# EAGLE board XstractiK_Domination_Player_UpperArm_V1 (EAGLE 9.6.2)
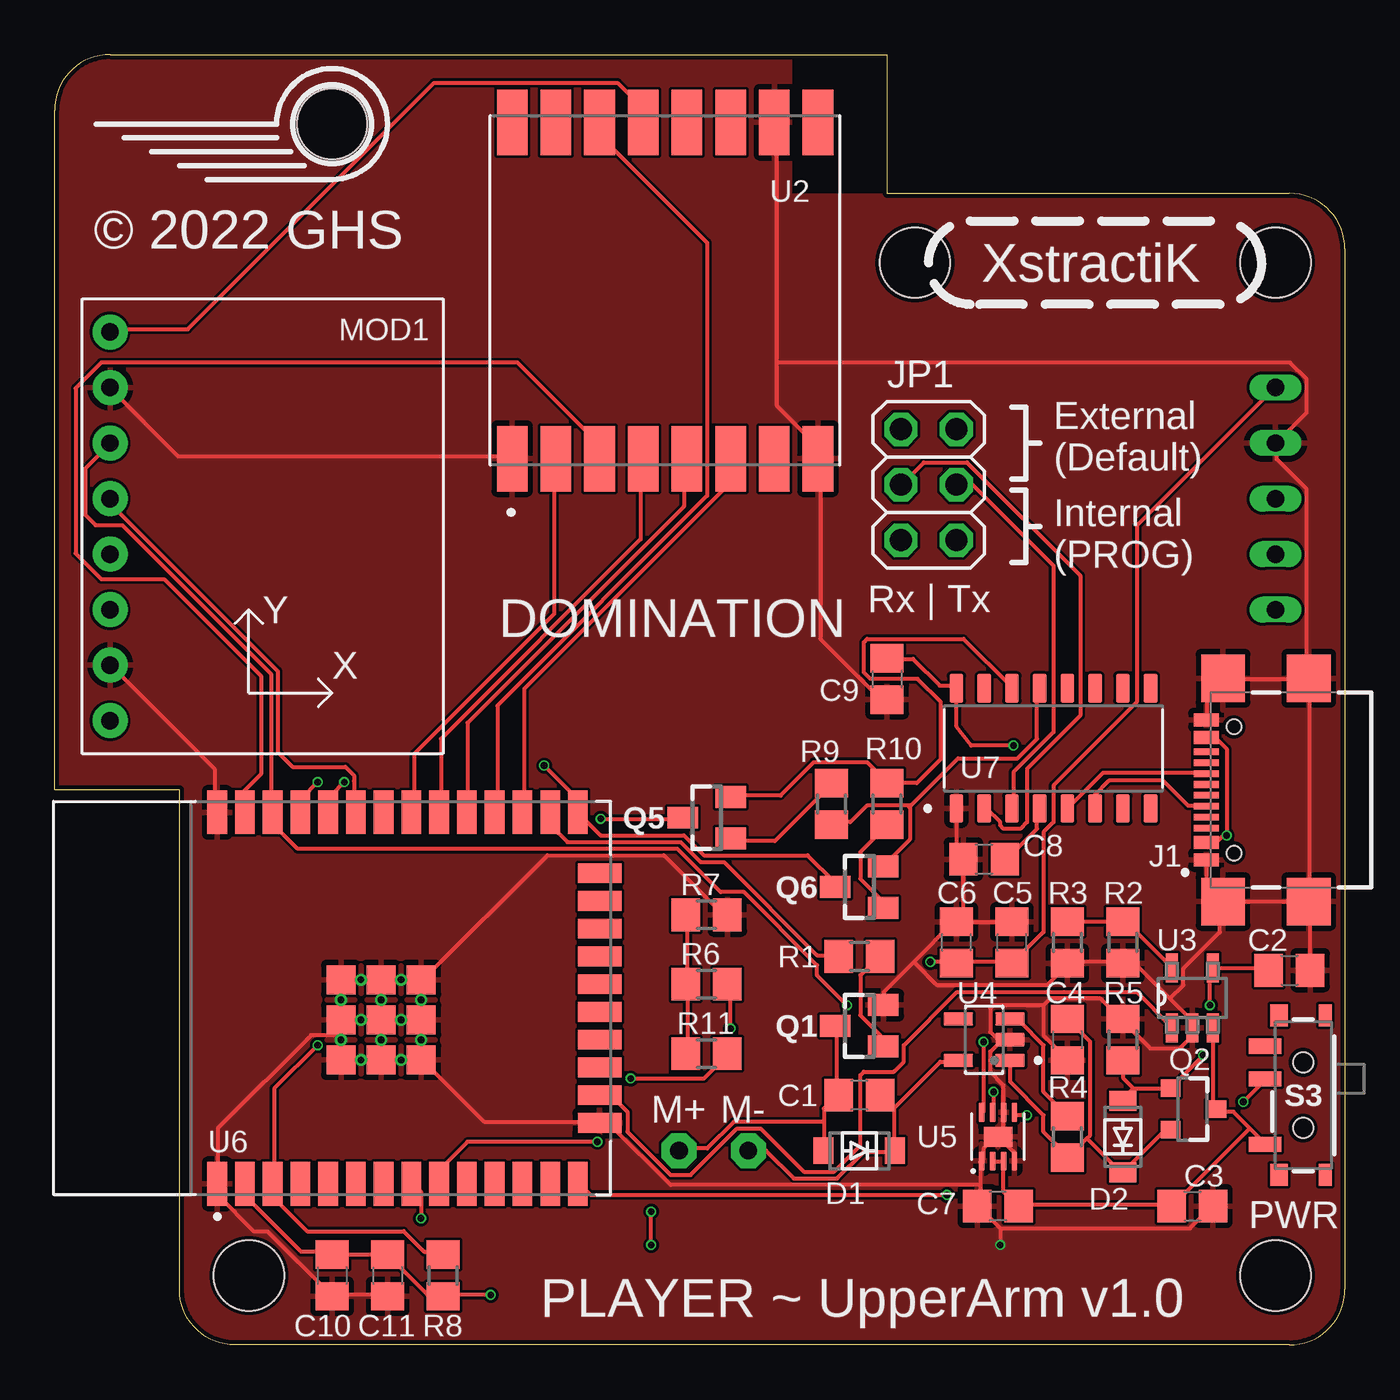
[diagram p0: board, top side]
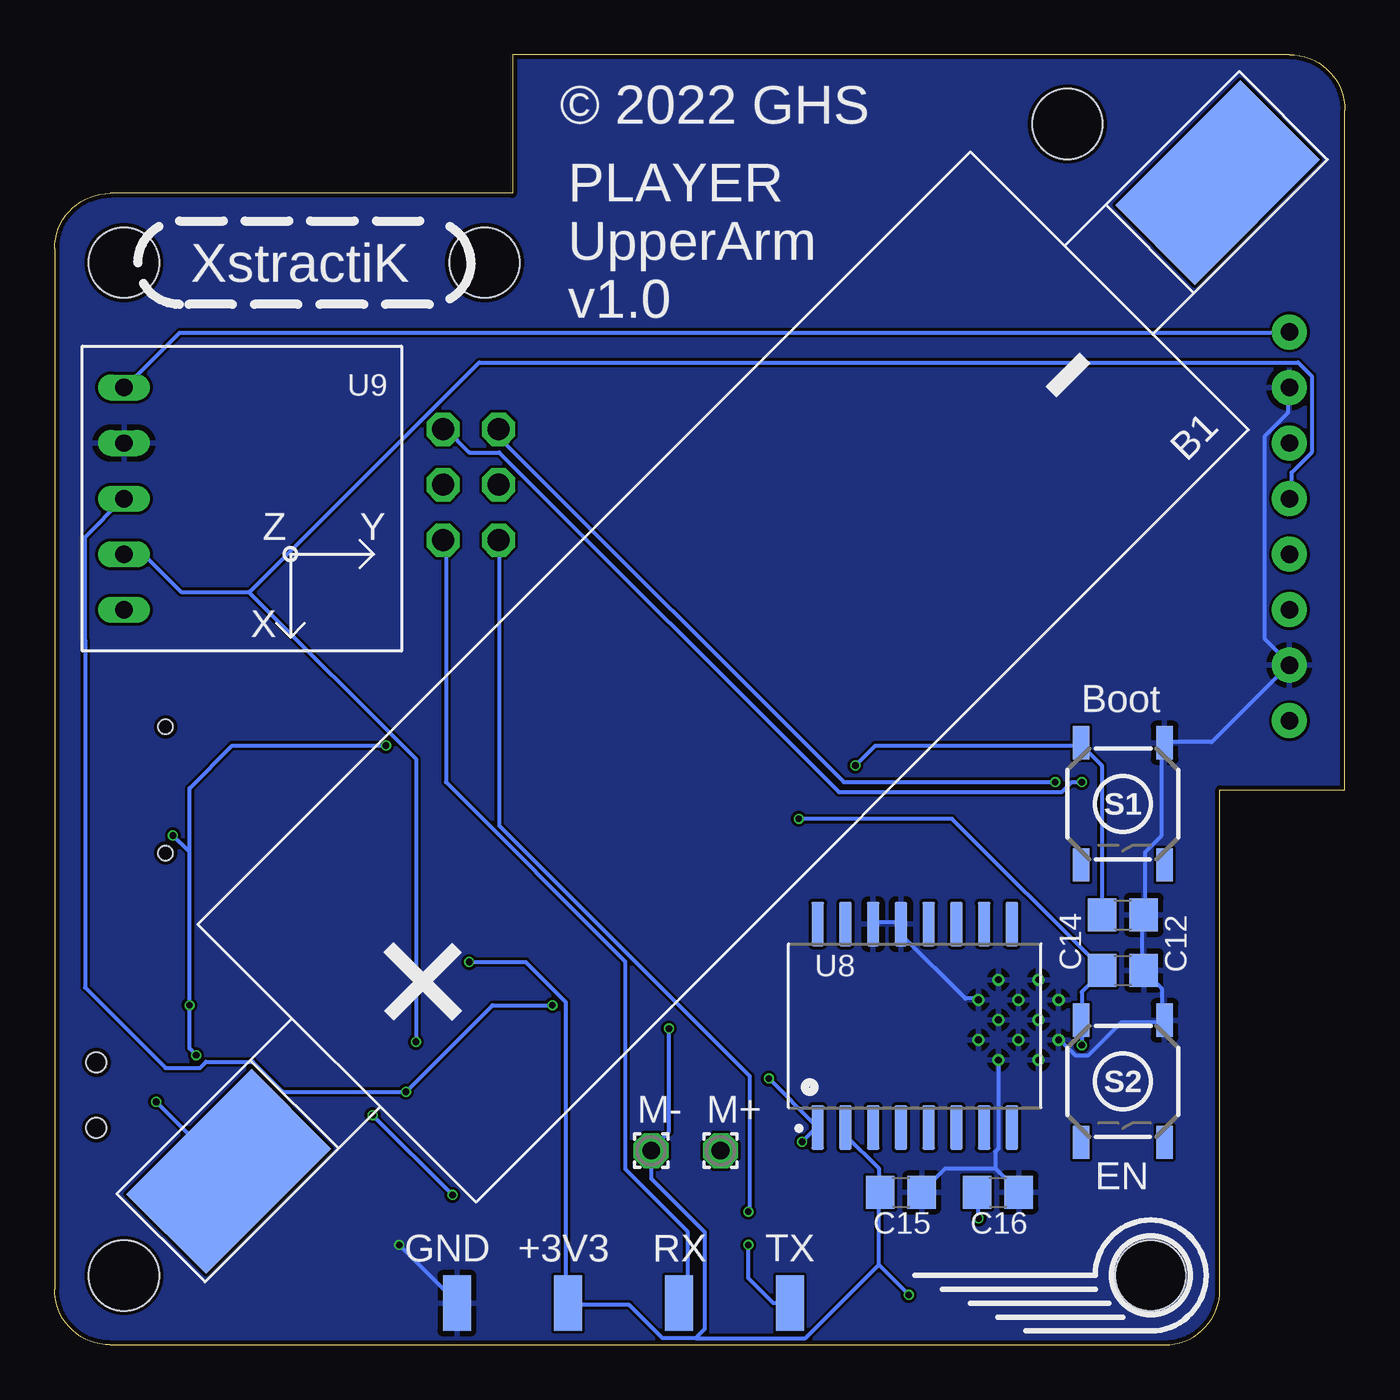
[diagram p1: board, bottom side, seen from below]

Size 59.05 x 59.05 mm. Coordinates in mm from the lower left corner, seen from the top.
Outline: 38.1,52.7 56.52,52.7 arc-90 59.05,50.16 59.05,2.54 arc-90 56.52,0 8.26,0 arc-90 5.71,2.54 5.71,25.4 0,25.4 0,56.52 arc-90 2.54,59.05 38.1,59.05 38.1,52.7
Copper layers (1*16): Top 0.035559375mm / dielectric 1.6mm / Bottom 0.035559375mm
Design rules "jlcpcb2layer *": minimum track width 7mil, minimum drill 12mil, track to track 5mil, track to pad 5mil, pad to pad 5mil, via to via 5mil, smd to smd 5mil, copper to edge 8mil, drill to drill 6mil, minimum pad ring 5mil, minimum via ring 3mil, stop-mask expansion 2.5mil, vias tented up to drill 0mil, thermal gap 10mil
Holes 3.2 mm at 8.89,3.17 55.88,3.17 55.88,49.53 12.7,55.88 39.37,49.53
tRestrict: area 33.8,57.5 to 38.1,59.1; area 33.8,54.4 to 34.2,57.5; area 33.8,52.7 to 38.1,54.4; area 35.7,54.4 to 38.1,57.5

## Footprints (pad centres in the part's own frame; a part is rotated, then mirrored left to right if it is on the bottom)
ICR18500 = smd 8.1 x 5.15: + 57,9; - -7,9
C0805 = smd 1.3 x 1.5: 1 -0.95,0; 2 0.95,0
ON_SEMICONDUCTOR_MBR120VLSFT1G_0 = smd 0.91 x 1.22: 1 -1.635,0; 2 1.635,0
GCT_USB4110-GF-A_REVB = smd 0.6 x 1.15: A1/B12 -3.2,1.27; A4/B9 -2.4,1.27; B1/A12 3.2,1.27; B4/A9 2.4,1.27 | smd 0.3 x 1.15: A5 -1.25,1.27; A6 -0.25,1.27; A7 0.25,1.27; A8 1.25,1.27; B5 1.75,1.27; B6 0.75,1.27; B7 -0.75,1.27; B8 -1.75,1.27 | smd 2.18 x 2: S1 -5.11,0.5; S2 5.11,0.5; S3 -5.11,-3.43; S4 5.11,-3.43 | hole 0.65: -2.89,0; 2.89,0
2X03 = drill 1.016 octagon: 1 -2.54,-1.27; 2 -2.54,1.27; 3 0,-1.27; 4 0,1.27; 5 2.54,-1.27; 6 2.54,1.27
GY-521 = drill 0.8 pad 1.6: 1 -6.985,8.89; 2 -6.985,6.35; 3 -6.985,3.81; 4 -6.985,1.27; 5 -6.985,-1.27; 6 -6.985,-3.81; 7 -6.985,-6.35; 8 -6.985,-8.89
1,6/0,8 = drill 0.813 pad 1.6 octagon: 1 0,0
SMD1,27-2,54 = smd 1.27 x 2.54: 1 0,0
SOT23-BEC = smd 1 x 1.4: B -0.95,-1.1; C 0,1.1; E 0.95,-1.1
SOT23-3 = smd 0.9 x 0.8: 1 1,-0.95; 2 1,0.95; 3 -1.1,0
R0805 = smd 1.3 x 1.5: 1 -0.95,0; 2 0.95,0
TACTILE_SWITCH_SMD_5.2MM = smd 1.524 x 0.762: 1 -2.794,1.905; 2 2.794,1.905; 3 -2.794,-1.905; 4 2.794,-1.905
SWITCH_SPST_SMD_A = smd 0.7 x 1.5: 1 -2.25,-1.75; 2 -0.75,-1.75; 3 2.25,-1.75 | smd 1 x 0.6: GND1 -3.65,1; GND3 3.65,1 | smd 1 x 0.8: GND2 -3.65,-1.1; GND4 3.65,-1.1 | hole 0.9: -1.5,0; 1.5,0
XCVR_RFM95W-915S2 = smd 3 x 1.4: 1 -7.7,7; 2 -7.7,5; 3 -7.7,3; 4 -7.7,1; 5 -7.7,-1; 6 -7.7,-3; 7 -7.7,-5; 8 -7.7,-7; 9 7.7,-7; 10 7.7,-5; 11 7.7,-3; 12 7.7,-1; 13 7.7,1; 14 7.7,3; 15 7.7,5; 16 7.7,7
SOT95P270X145-5N = smd 1.321 x 0.559: 1 -1.372,0.94; 2 -1.372,0; 3 -1.372,-0.94; 4 1.372,-0.94; 5 1.372,0.94
SOT95P285X140-5N = smd 1.35 x 0.6: 1 -1.185,0.95; 2 -1.185,0; 3 -1.185,-0.95; 4 1.185,-0.95; 5 1.185,0.95
SON50P200X200X80-9N = smd 0.889 x 0.27: 1 -1.112,0.75; 2 -1.112,0.25; 3 -1.112,-0.25; 4 -1.112,-0.75; 5 1.112,-0.75; 6 1.112,-0.25; 7 1.112,0.25; 8 1.112,0.75 | smd 0.9 x 1.3: 9 0,0
MODULE_ESP32-WROOM-32D = smd 2 x 0.9: 1 -8.5,5.26; 2 -8.5,3.99; 3 -8.5,2.72; 4 -8.5,1.45; 5 -8.5,0.18; 6 -8.5,-1.09; 7 -8.5,-2.36; 8 -8.5,-3.63; 9 -8.5,-4.9; 10 -8.5,-6.17; 11 -8.5,-7.44; 12 -8.5,-8.71; 13 -8.5,-9.98; 14 -8.5,-11.25; 25 8.5,-11.25; 26 8.5,-9.98; 27 8.5,-8.71; 28 8.5,-7.44; 29 8.5,-6.17; 30 8.5,-4.9; 31 8.5,-3.63; 32 8.5,-2.36; 33 8.5,-1.09; 34 8.5,0.18; 35 8.5,1.45; 36 8.5,2.72; 37 8.5,3.99; 38 8.5,5.26 | smd 0.9 x 2: 15 -5.715,-12.25; 16 -4.445,-12.25; 17 -3.175,-12.25; 18 -1.905,-12.25; 19 -0.635,-12.25; 20 0.635,-12.25; 21 1.905,-12.25; 22 3.175,-12.25; 23 4.445,-12.25; 24 5.715,-12.25 | smd 1.33 x 1.33: 39_1 -2.835,-0.405; 39_2 -1,-0.405; 39_3 0.835,-0.405; 39_4 -2.835,-2.24; 39_5 -1,-2.24; 39_6 0.835,-2.24; 39_7 -2.835,-4.075; 39_8 -1,-4.075; 39_9 0.835,-4.075 | drill 0.305 pad 0.508: 39_10 -1.917,-0.405; 39_11 -0.083,-0.405; 39_12 -2.835,-1.323; 39_13 -1,-1.323; 39_14 0.835,-1.323; 39_15 -1.917,-2.24; 39_16 -0.083,-2.24; 39_17 -2.835,-3.158; 39_18 -1,-3.158; 39_19 0.835,-3.158; 39_20 -1.917,-4.075; 39_21 -0.083,-4.075
SOIC127P600X180-16N = smd 1.31 x 0.62: 1 -2.75,4.445; 2 -2.75,3.175; 3 -2.75,1.905; 4 -2.75,0.635; 5 -2.75,-0.635; 6 -2.75,-1.905; 7 -2.75,-3.175; 8 -2.75,-4.445; 9 2.75,-4.445; 10 2.75,-3.175; 11 2.75,-1.905; 12 2.75,-0.635; 13 2.75,0.635; 14 2.75,1.905; 15 2.75,3.175; 16 2.75,4.445
SOIC127P1032X265-16N = smd 2.05 x 0.59: 1 -4.655,4.445; 2 -4.655,3.175; 3 -4.655,1.905; 4 -4.655,0.635; 5 -4.655,-0.635; 6 -4.655,-1.905; 7 -4.655,-3.175; 8 -4.655,-4.445; 9 4.655,-4.445; 10 4.655,-3.175; 11 4.655,-1.905; 12 4.655,-0.635; 13 4.655,0.635; 14 4.655,1.905; 15 4.655,3.175; 16 4.655,4.445
GY-271 = drill 0.8 long: 1 -5.08,5.08; 2 -5.08,2.54; 3 -5.08,0; 4 -5.08,-2.54; 5 -5.08,-5.08

## Placement (x,y rotation side)
B1  ICR18500  [ICR18500]  17.14,54.61 225 bottom
C1  0.1uF  [C0805]  36.83,11.43 180 top
C2  4.7uF  [C0805]  56.52,17.14 0 top
C3  4.7uF  [C0805]  52.07,6.35 0 top
C4  10uF  [C0805]  46.35,13.97 270 top
C5  10uF  [C0805]  43.81,18.41 90 top
C6  1uF  [C0805]  41.27,18.41 90 top
C7  0.1uF  [C0805]  43.18,6.35 180 top
C8  0.01uF  [C0805]  42.55,22.23 180 top
C9  0.1uF  [C0805]  38.1,30.48 270 top
C10  0.1uF  [C0805]  12.7,3.17 270 top
C11  22uF  [C0805]  15.24,3.17 270 top
C12  0.1uF  [C0805]  10.16,17.14 0 bottom
C14  0.1uF  [C0805]  10.16,19.68 0 bottom
C15  0.1uF  [C0805]  20.32,6.99 0 bottom
C16  1nF  [C0805]  15.88,6.99 0 bottom
D1  ON_SEMICONDUCTOR_MBR120VLSFT1GON_SEMICONDUCTOR_MBR120VLSFT1G_0_0  [ON_SEMICONDUCTOR_MBR120VLSFT1G_0]  36.83,8.89 180 top
D2  ON_SEMICONDUCTOR_MBR120VLSFT1GON_SEMICONDUCTOR_MBR120VLSFT1G_0_0  [ON_SEMICONDUCTOR_MBR120VLSFT1G_0]  48.9,9.53 90 top
J1  USB4110-GF-A_REVB  [GCT_USB4110-GF-A_REVB]  53.98,25.4 90 top
JP1  [2X03]  40.01,39.37 90 top
MOD1  GY-521MPU6050  [GY-521]  9.53,37.47 0 top
PAD5  WIREPAD1,6/0,8  [1,6/0,8]  31.75,8.89 0 bottom
PAD6  WIREPAD1,6/0,8  [1,6/0,8]  28.57,8.89 0 bottom
PAD7  WIREPADSMD1,27-254  [SMD1,27-2,54]  35.56,1.91 0 bottom
PAD8  WIREPADSMD1,27-254  [SMD1,27-2,54]  30.48,1.91 0 bottom
PAD9  WIREPADSMD1,27-254  [SMD1,27-2,54]  25.4,1.91 0 bottom
PAD10  WIREPADSMD1,27-254  [SMD1,27-2,54]  40.64,1.91 0 bottom
Q1  MMBT2222  [SOT23-BEC]  36.83,14.61 90 top
Q2  AO3401A  [SOT23-3]  52.07,10.79 180 top
Q5  MMBT2222  [SOT23-BEC]  29.84,24.13 90 top
Q6  MMBT2222  [SOT23-BEC]  36.83,20.95 90 top
R1  1K  [R0805]  36.83,17.78 0 top
R2  2K  [R0805]  48.9,18.41 90 top
R3  [R0805]  46.35,18.41 90 top
R4  100K  [R0805]  46.35,9.53 90 top
R5  100K  [R0805]  48.9,13.97 270 top
R6  680K  [R0805]  29.84,16.51 0 top
R7  220K  [R0805]  29.84,19.68 180 top
R8  100K  [R0805]  17.78,3.17 270 top
R9  10K  [R0805]  35.56,24.77 270 top
R10  10K  [R0805]  38.1,24.77 90 top
R11  10K  [R0805]  29.84,13.34 180 top
S1  MOMENTARY-SWITCH-SPST-SMD-5.2MM-TALL  [TACTILE_SWITCH_SMD_5.2MM]  10.16,24.77 270 bottom
S2  MOMENTARY-SWITCH-SPST-SMD-5.2MM-TALL  [TACTILE_SWITCH_SMD_5.2MM]  10.16,12.06 270 bottom
S3  [SWITCH_SPST_SMD_A]  57.15,11.43 270 top
U2  RFM95W-915S2  [XCVR_RFM95W-915S2]  27.94,48.26 90 top
U3  MCP73831T  [SOT95P270X145-5N]  52.07,15.88 90 top
U4  AP2112K-3.3  [SOT95P285X140-5N]  42.55,13.97 180 top
U5  MAX17048G  [SON50P200X200X80-9N]  43.18,9.53 90 top
U6  ESP32-WROOM-32D  [MODULE_ESP32-WROOM-32D]  12.7,15.88 90 top
U7  CH340C  [SOIC127P600X180-16N]  45.72,27.3 90 top
U8  DS3231SN  [SOIC127P1032X265-16N]  19.68,14.61 90 bottom
U9  QMC5883GY-271  [GY-271]  50.8,38.73 0 bottom

## Library data of the parts
B1 = Batteries
C1-C12 C14-C16 = rcl; SPICEPREFIX: C
D1 D2 = MBR120VLSFT1G; COMPONENT_LINK_1_DESCRIPTION: Manufacturer URL; COMPONENT_LINK_1_URL: http://www.onsemi.com/; COMPONENT_LINK_3_DESCRIPTION: Package Specification; COMPONENT_LINK_3_URL: http://www.onsemi.cn/pub_link/Collateral/MBR120VLSFT1-D.PDF; CONFIGURATION: Single; DATASHEET: http://www.onsemi.cn/pub_link/Collateral/MBR120VLSFT1-D.PDF; DATASHEET_VERSION: Rev. 2; IFSM_MAX_A: 45; IMPORTED: yes; IMPORTED_FROM: vault; IMPORT_TS: 1521178043; MF: On Semiconductor; MOUNTING_TECHNOLOGY: Surface Mount; MPN: MBR120VLSFT1G; PACKAGE: SOD-123FL-2-498-01; PACKAGE_DESCRIPTION: 2-Pin SOD, Body 1.65 x 2.7 mm; PACKAGE_VERSION: Rev. A; PACKING: Tape and Reel; PREFIX: D; ROHS: Yes; VAULT_GUID: 4A61E613-4CE2-4B75-A462-25A6CC2A8907; VAULT_REVISION: 780FB999-FC13-4133-9298-794FC10DBA1F
J1 = USB-C-SMD; AVAILABILITY: In Stock; DESCRIPTION: USB-C (USB TYPE-C) USB 2.0 Receptacle Connector 24 (16+8 Dummy) Position Surface Mount, Right Angle; Through Hole; MF: GCT; MP: USB4110-GF-A; PACKAGE: None; PRICE: None; PURCHASE-URL: https://pricing.snapeda.com/search/part/USB4110-GF-A/?ref=eda
JP1 = pinhead
MOD1 = MPU6050; AVAILABILITY: Not in stock; DESCRIPTION: Triple Axis Accelerometer Gyro Breakout; MF: GODREAM FORDREAM CO., LIMITED; MP: GY-521; PACKAGE: Package; PRICE: None
PAD5-PAD10 = wirepad
Q1 Q5 Q6 = MMBT2222; AVAILABILITY: In Stock; DESCRIPTION: Bipolar (BJT) Transistor NPN 30 V 600 mA 250MHz 300 mW Surface Mount SOT-23-3 (TO-236); MF: ON Semiconductor; MP: MMBT2222; PACKAGE: SOT-23-3 Fairchild Semiconductor; PRICE: None; PURCHASE-URL: https://pricing.snapeda.com/search/part/MMBT2222/?ref=eda
Q2 = AO3401A; AVAILABILITY: In Stock; DESCRIPTION: P-Channel 30 V 4A (Ta) 1.4W (Ta) Surface Mount SOT-23-3; MF: Alpha & Omega Semiconductor Inc.; MP: AO3401A; PACKAGE: TO-236-3 Alpha &amp; Omega Semiconductor Inc.; PRICE: None; PURCHASE-URL: https://pricing.snapeda.com/search/part/AO3401A/?ref=eda
R1-R11 = rcl; SPICEPREFIX: R
S1 S2 = Switches; PROD_ID: SWCH-14139
S3 = Switches; PROD_ID: SWCH-10651; SF_SKU: COM-10860
U2 = RFM95W-915S2; AVAILABILITY: In Stock; DESCRIPTION: 802.15.4 LoRa™ Transceiver Module 915MHz Antenna Not Included Surface Mount; MF: RF Solutions; MP: RFM95W-915S2; PACKAGE: SMD-16 RF Solutions; PRICE: None; PURCHASE-URL: https://pricing.snapeda.com/search/part/RFM95W-915S2/?ref=eda
U3 = MCP73831T-3ACI_OT; AVAILABILITY: In Stock; DESCRIPTION: Charger IC Lithium Ion/Polymer SOT-23-5; MF: Microchip; MP: MCP73831T-3ACI/OT; PACKAGE: SOT-23-5 Microchip; PRICE: None; PURCHASE-URL: https://pricing.snapeda.com/search/part/MCP73831T-3ACI/OT/?ref=eda
U4 = AP2112K-3.3TRG1; AVAILABILITY: In Stock; DESCRIPTION: Linear Voltage Regulator IC Positive Fixed 1 Output 600mA SOT-25; MF: Diodes Inc.; MP: AP2112K-3.3TRG1; PACKAGE: SOT-753 Diodes Inc.; PRICE: None; PURCHASE-URL: https://pricing.snapeda.com/search/part/AP2112K-3.3TRG1/?ref=eda
U5 = MAX17048G; AVAILABILITY: In Stock; DESCRIPTION: Battery Battery Monitor IC Lithium Ion 8-TDFN-EP (2x2); MF: Maxim Integrated; MP: MAX17048G; PACKAGE: TDFN-8 Maxim; PRICE: None; PURCHASE-URL: https://pricing.snapeda.com/search/part/MAX17048G/?ref=eda
U6 = ESP32-WROOM-32D; AVAILABILITY: In Stock; DESCRIPTION: Bluetooth, WiFi 802.11b/g/n, Bluetooth v4.2 +EDR, Class 1, 2 and 3 Transceiver Module 2.4GHz ~ 2.5GHz Integrated; MF: Espressif Systems; MP: ESP32-WROOM-32D; PACKAGE: Module Espressif Systems; PRICE: None; PURCHASE-URL: https://pricing.snapeda.com/search/part/ESP32-WROOM-32D/?ref=eda
U7 = CH340C; AVAILABILITY: Not in stock; DESCRIPTION: USB to serial chip CH340; MF: WCH; MP: CH340C; PACKAGE: None; PRICE: None
U8 = DS3231SN; AVAILABILITY: In Stock; DESCRIPTION: Real Time Clock (RTC) IC Clock/Calendar - I²C, 2-Wire Serial 16-SOIC (0.295, 7.50mm Width); MF: Maxim Integrated; MP: DS3231SN; PACKAGE: SOIC-16 Maxim; PRICE: None; PURCHASE-URL: https://pricing.snapeda.com/search/part/DS3231SN/?ref=eda
U9 = QMC5883

## Nets
32K_XN: R11.1 U6.9 U8.1
32K_XP: C16.1 U6.8
+: B1.+ S3.2
+0.8V: R6.1 R7.2 R11.2
+3V3: C1.1 C5.1 C6.1 C10.1 C11.1 C15.1 D1.1 MOD1.1 PAD5.1 PAD7.1 R6.2 R8.2 U2.13 U4.5 U6.2 U8.2 U9.1
-: B1.-
BAT_!ALRT: U5.5 U6.14
BAT_CHRG: U3.1 U6.16
BOOT: C14.1 Q6.C S1.3 U6.25
CHRG_PROG: R2.2 R3.2 U3.5
EN: C12.1 Q5.C R8.1 S2.3 U6.3
GND: C2.2 C3.2 C4.2 C5.2 C6.2 C7.2 C8.2 C9.2 C10.2 C11.2 C12.2 C14.2 C15.2 C16.2 J1.A1/B12 J1.B1/A12 J1.S1 J1.S2 J1.S3 J1.S4 MOD1.2 MOD1.7 PAD10.1 Q1.E R2.1 R3.1 R5.1 R7.1 S1.1 S2.1 U2.1 U2.8 U2.10 U3.2 U4.2 U5.1 U5.4 U5.6 U5.9 U6.1 U6.15 U6.38 U6.39_1 U6.39_2 U6.39_3 U6.39_4 U6.39_5 U6.39_6 U6.39_7 U6.39_8 U6.39_9 U6.39_10 U6.39_11 U6.39_12 U6.39_13 U6.39_14 U6.39_15 U6.39_16 U6.39_17 U6.39_18 U6.39_19 U6.39_20 U6.39_21 U7.1 U8.13 U8.14 U9.2
I2C_SCL: MOD1.3 U5.7 U6.36 U9.3
I2C_SDA: MOD1.4 U5.8 U6.33 U9.4
LORA_!RST: U2.6 U6.27
LORA_DIO0: U2.14 U6.28
LORA_SS: U2.5 U6.29
M-: C1.2 D1.2 PAD6.1 Q1.C
N$2: Q1.B R1.2
N$6: Q6.B R10.1
N$7: Q5.B R9.1
REG_EN: R4.2 U4.3
REG_VIN: C4.1 D2.1 Q2.2 R4.1 U4.1
RXD: JP1.4 U7.2
RXD0: JP1.6 U6.34
RXD0_EXT: JP1.2 PAD9.1
SPI_MISO: U2.2 U6.31
SPI_MOSI: U2.3 U6.37
SPI_SCK: U2.4 U6.30
TXD: JP1.3 U7.3
TXD0: JP1.5 U6.35
TXD0_EXT: JP1.1 PAD8.1
UART_!DTR: Q6.E R9.2 U7.13
UART_!RTS: Q5.E R10.2 U7.14
USB_DN: J1.B7 U7.6
USB_DP: J1.B6 U7.5
V3: C8.1 U7.4
VBAT: C3.1 C7.1 Q2.3 S3.3 U3.3 U5.2 U5.3
VBUS: C2.1 C9.1 D2.2 J1.A4/B9 J1.B4/A9 Q2.1 R5.2 U3.4 U7.16
VIBR_EN: R1.1 U6.26

## Tracks (layer width: path | path; a pad name or v marks a point on that pad's centre or on a via)
32K_XN  (via drill 0.3)
  Top 0.178: v26.36,12.19 29.72,12.19 30.79,13.26 R11.1 | v24.84,9.3 18.9,9.3 17.68,8.08 17.68,7.47 U6.9
  Bottom 0.178: v26.36,12.19 24.23,10.06 U8.1 24.23,9.91 v24.84,9.3
32K_XP  (via drill 0.3)
  Top 0.178: v16.76,5.79 16.76,7.01 16.46,7.32 U6.8
  Bottom 0.178: v16.76,5.79 16.76,6.86 C16.1
+  (via drill 0.3)
  Top 0.178: v54.41,11.12 55.32,12.04 S3.2
  Bottom 0.178: v54.41,11.12 51.21,7.92 B1.+
+0.8V
  Top 0.178: R11.2 28.96,13.41 28.96,16.46 R6.1 28.96,16.61 28.96,19.66 R7.2
+3V3  (via drill 0.3)
  Top 0.178: C11.1 12.8,4.12 C10.1 12.65,4.27 11.28,4.27 8.84,6.71 8.84,7.32 U6.2 | C11.1 17.07,2.29 17.68,2.29 R8.2 17.83,2.29 v19.96,2.29 | C11.1 | 38.41,10.82 38.41,8.99 D1.1 38.41,8.84 37.03,8.84 35.81,7.62 33.83,7.62 32.56,8.89 PAD5.1 | 38.41,10.82 37.8,11.43 C1.1 38.41,10.82 | 38.41,10.82 40.54,12.95 41.3,12.95 U4.5 | v30.94,14.48 30.94,16.46 R6.2 | U2.13 26.82,56.08 26.82,56.69 25.76,57.76 17.37,57.76 6.1,46.48 2.59,46.48 MOD1.1 | U9.1 55.78,43.74 49.53,37.49 49.53,29.41 45.72,25.6 45.72,23.93 45.26,23.47 45.26,18.9 43.89,17.53 C5.1 43.74,17.53 41.3,17.53 C6.1 41.15,17.53 v40.08,17.53
  Bottom 0.178: U8.2 22.86,9.6 21.34,8.08 21.34,7.01 C15.1 21.34,6.86 21.34,3.66 | v30.94,14.48 30.94,9.75 31.7,8.99 PAD5.1 31.75,7.62 29.31,5.18 29.31,0.71 29.72,0.3 | 29.72,0.3 31.24,0.3 32.77,1.83 35.51,1.83 PAD7.1 35.66,1.98 35.66,15.7 37.49,17.53 v40.08,17.53 | 21.34,3.66 24.69,0.3 29.72,0.3 | 21.34,3.66 v19.96,2.29 | MOD1.1 2.59,46.33 53.34,46.33 55.78,43.89 U9.1
BAT_!ALRT  (via drill 0.3)
  Top 0.178: v44.5,10.52 44.04,10.52 U5.5 | v40.84,6.86 24.54,6.86 24.08,7.32 U6.14
  Bottom 0.178: v40.84,6.86 v44.5,10.52
BAT_CHRG
  Top 0.178: U6.16 25.45,11.43 26.21,10.67 26.21,9.75 28.19,7.77 29.11,7.77 31.24,9.91 32.31,9.91 34.29,7.92 35.66,7.92 36.88,9.14 36.88,12.34 37.03,12.5 38.41,12.5 38.86,12.95 38.86,13.72 41.3,16.15 49.53,16.15 51.05,14.63 U3.1
BOOT  (via drill 0.3)
  Top 0.178: Q6.C 35.73,21.14 34.47,22.4 29.72,22.4 28.8,23.32 24.99,23.32 24.08,24.23 U6.25 23.93,24.38 23.93,24.99 v22.4,26.52
  Bottom 0.178: C14.1 11.12,19.81 11.12,26.52 12.04,27.43 S1.3 12.19,27.43 21.49,27.43 v22.4,26.52
CHRG_PROG
  Top 0.178: U3.5 51.05,17.37 48.92,19.51 R2.2 48.77,19.36 46.48,19.36 R3.2
EN  (via drill 0.3)
  Top 0.178: R8.1 17.68,4.27 16.92,4.27 15.98,5.21 11.56,5.21 10.06,6.71 10.06,7.32 U6.3 10.06,7.47 10.06,11.73 v12.04,13.72 | v24.99,24.08 28.65,24.08 Q5.C
  Bottom 0.178: v24.99,24.08 17.98,24.08 11.12,17.22 C12.1 11.12,17.07 12.04,16.15 12.04,14.94 S2.3 12.04,14.78 v12.04,13.72
GND  (via drill 0.3)
  Top 0.178: U2.1 20.88,40.69 5.64,40.69 2.59,43.74 MOD1.2 | 14.94,14.94 14.17,14.94 U6.39_13 | U6.39_15 14.94,14.02 14.94,14.78 U6.39_5 | U6.39_5 15.09,14.94 15.85,14.94 U6.39_18 16,14.94 16.76,14.94 U6.39_8 16.76,14.78 16.76,14.02 U6.39_20 16.76,13.87 16.76,13.11 | U6.39_12 14.17,13.11 14.94,13.11 U6.39_4 15.09,13.11 15.85,13.11 U6.39_17 16,13.11 16.76,13.11 | 16.76,13.11 U6.39_7 16.92,12.95 19.66,10.21 24.84,10.21 U6.15 24.99,10.06 25.45,10.06 28.19,7.32 42.37,7.32 | U6.38 7.32,24.38 7.32,26.36 2.59,31.09 MOD1.7 | C11.2 15.24,2.29 12.8,2.29 C10.2 12.65,2.29 9.75,5.18 9.14,5.18 7.47,6.86 7.47,7.32 U6.1 7.47,7.47 7.47,9.91 11.73,14.17 13.11,14.17 | 13.11,14.17 13.11,14.78 U6.39_2 13.11,14.94 13.11,15.7 U6.39_11 13.11,15.85 13.11,16.61 U6.39_3 13.11,16.76 14.02,16.76 U6.39_14 14.17,16.76 14.94,16.76 U6.39_6 | 13.11,14.17 13.11,14.02 U6.39_10 | U6.39_1 13.11,13.11 13.11,13.87 U6.39_10 | U6.39_6 14.94,16.61 14.94,15.85 U6.39_16 14.94,15.7 14.94,14.94 | U6.39_6 15.09,16.76 15.85,16.76 U6.39_19 16,16.76 16.76,16.76 U6.39_9 | U6.39_21 16.76,15.85 16.76,16.61 U6.39_9 | R7.1 30.79,19.81 30.48,19.81 27.89,22.4 22.55,22.4 16.92,16.76 U6.39_9 | 13.11,14.17 U6.39_10 | 14.94,14.94 U6.39_5 | C9.2 38.1,29.57 37.8,29.57 35.05,32.31 35.05,40.54 U2.8 34.9,40.69 34.9,41.15 33.07,42.98 33.07,44.96 | 33.07,44.96 33.07,55.93 U2.10 | U5.9 43.13,9.6 42.52,8.99 42.52,8.53 U5.1 42.37,8.38 42.37,7.32 | U5.4 43.89,8.53 43.89,8.84 43.28,9.45 U5.9 | U5.9 43.28,9.6 43.43,9.75 43.43,10.52 U5.6 43.43,10.67 43.43,11.89 42.82,12.5 42.82,13.41 43.28,13.87 | 43.28,13.87 43.59,13.87 U4.2 43.28,13.87
  Top 0.178: 42.37,7.32 42.37,6.4 C7.2 42.37,6.25 43.28,5.33 | 43.28,5.33 51.97,5.33 52.88,6.25 C3.2 | 43.28,5.33 v43.28,4.57 | J1.B1/A12 52.73,28.65 52.73,29.87 53.34,30.48 J1.S2 53.49,30.48 57.3,30.48 J1.S4 | J1.S4 57.3,30.63 57.3,39.17 55.93,40.54 55.93,41.15 U9.2 55.93,41.3 57.3,42.67 57.3,44.2 56.54,44.96 33.07,44.96 | U7.1 41.3,24.54 41.3,22.4 41.45,22.25 C8.2 41.6,22.1 41.6,19.36 | 39.32,17.53 41.15,19.36 C6.2 | 39.32,17.53 37.95,16.15 37.95,15.7 Q1.E | 41.6,19.36 41.3,19.36 C6.2 | 41.6,19.36 43.74,19.36 C5.2 | 41.6,19.36 C6.2 | J1.A1/B12 52.73,22.1 52.73,21.03 53.34,20.42 J1.S1 | C2.2 57.45,17.22 57.45,20.27 J1.S3 | J1.S1 53.49,20.27 57.3,20.27 J1.S3 | 45.26,15.54 45.26,14.17 46.33,13.11 C4.2 | 45.26,15.54 45.57,15.85 47.85,15.85 48.77,14.94 R5.1 48.92,14.78 50.14,13.56 51.51,13.56 51.97,14.02 51.97,14.48 U3.2 51.97,14.63 51.97,14.94 51.05,15.85 | 51.05,15.85 49.53,17.37 48.92,17.37 R2.1 48.77,17.53 46.48,17.53 R3.1 46.33,17.37 45.41,16.46 40.39,16.46 39.32,17.53 | 51.05,15.85 51.66,16.46 51.66,17.22 53.34,18.9 53.34,20.27 J1.S1 | J1.S4 57.45,30.48 57.45,20.42 J1.S3 | 43.28,13.87 42.82,14.33 42.82,15.39 42.98,15.54 45.26,15.54
  Bottom 0.178: 16,8.08 14.94,7.01 C16.2 | 16,8.08 18.29,8.08 19.36,7.01 C15.2 | 16,8.08 16,8.84 15.85,8.99 15.85,12.95 U6.39_17 | U8.14 21.49,19.36 20.42,19.36 U8.13 20.27,19.2 20.27,18.75 17.37,15.85 16.92,15.85 U6.39_21 | U6.39_10 12.95,13.87 12.34,13.26 11.73,13.26 10.21,14.78 8.38,14.78 S2.1 8.38,14.94 8.38,16.31 9.14,17.07 C12.2 9.3,17.22 9.3,19.66 C14.2 9.14,19.81 9.14,22.55 8.38,23.32 8.38,27.43 S1.1 8.23,27.58 6.1,27.58 2.59,31.09 MOD1.7 2.59,31.24 3.66,32.31 3.66,41.6 2.59,42.67 2.59,43.74 MOD1.2 | v43.28,4.57 40.69,1.98 PAD10.1
  pour Top: 0,56.52 arc-90 2.54,59.05 38.1,59.05 38.1,52.7 56.52,52.7 arc-90 59.05,50.16 59.05,49.53 59.05,2.54 arc-90 56.52,0 8.26,0 arc-90 5.71,2.54 5.71,25.4 0,25.4
  pour Bottom: 0,55.88 0,56.52 arc-90 2.54,59.05 38.1,59.05 38.1,52.7 56.52,52.7 arc-90 59.05,50.16 59.05,2.54 arc-90 56.52,0 8.26,0 arc-90 5.71,2.54 5.71,25.4 0,25.4
I2C_SCL  (via drill 0.3)
  Top 0.178: MOD1.3 2.44,41.15 1.4,40.11 1.4,38 1.88,37.52 3.1,37.52 9.91,30.71 9.91,24.38 U6.36 10.06,24.23 10.06,23.77 11.12,22.71 28.5,22.71 30.48,20.73 31.55,20.73 34.9,17.37 34.9,16.92 v36.27,15.54 | v42.98,11.58 42.98,10.67 U5.7
  Bottom 0.178: U9.3 55.93,38.71 57.68,36.96 57.68,32.28 57.66,32.26 57.66,16.36 53.98,12.68 52.4,12.68 52.12,12.95 49.99,12.95 48.62,11.58 v42.98,11.58 39.01,15.54 v36.27,15.54
I2C_SDA  (via drill 0.3)
  Top 0.178: U6.33 13.72,24.38 13.72,25.78 13.7,25.79 13.7,26.07 13.32,26.45 10.88,26.45 10.21,27.13 10.21,30.84 2.54,38.51 MOD1.4 | v42.52,13.87 42.52,10.67 U5.8
  Bottom 0.178: v42.52,13.87 42.52,26.82 50.14,34.44 | 50.14,34.44 50.16,34.47 53.26,34.47 54.99,36.2 U9.4 | 50.14,34.44 39.62,44.96 2.13,44.96 1.52,44.35 1.52,40.84 2.44,39.93 2.44,38.84 MOD1.4
LORA_!RST
  Top 0.178: U6.27 21.49,24.38 21.49,30.02 30.94,39.47 30.94,40.54 U2.6
LORA_DIO0
  Top 0.178: U6.28 20.27,24.38 20.27,29.26 29.87,38.86 29.87,50.44 24.99,55.32 24.99,55.93 U2.14
LORA_SS
  Top 0.178: U6.29 18.9,24.38 18.9,28.47 28.8,38.38 28.8,40.54 U2.5
M-
  Top 0.178: 35.2,10.21 35.2,10.82 35.81,11.43 | 35.2,10.21 35.2,8.99 D1.2 | 35.81,11.43 35.81,14.48 Q1.C | 35.81,11.43 C1.2 | 35.2,10.21 31.09,10.21 29.87,8.99 28.65,8.99 PAD6.1
N$2
  Top 0.178: Q1.B 37.8,13.72 37.8,14.17 36.88,15.09 36.88,16.92 37.64,17.68 R1.2
N$6
  Top 0.178: Q6.B 37.8,20.12 37.8,20.42 36.88,21.34 36.88,22.55 38.1,23.77 R10.1
N$7
  Top 0.178: Q5.B 31.06,23.06 32.97,23.06 35.51,25.6 R9.1
REG_EN
  Top 0.178: U4.3 43.74,14.78 44.2,14.78 45.26,13.72 45.26,11.58 46.33,10.52 R4.2
REG_VIN
  Top 0.178: Q2.2 51.05,9.75 50.75,9.75 48.92,7.92 D2.1 48.77,7.92 47.24,9.45 | U4.1 43.74,12.95 43.74,12.04 45.26,10.52 45.26,9.75 46.33,8.69 R4.1 46.48,8.69 47.24,9.45 | 47.24,9.45 47.4,9.6 47.4,13.87 46.48,14.78 C4.1
RXD
  Top 0.178: U7.2 42.67,24.54 43.28,23.93 43.28,23.77 43.43,23.62 44.2,23.62 44.5,23.93 44.5,26.36 46.94,28.8 46.94,35.2 41.76,40.39 39.78,40.39 38.86,39.47 JP1.4
RXD0  (via drill 0.3)
  Top 0.178: v13.26,25.76 12.65,25.15 12.65,24.38 U6.34
  Bottom 0.178: v13.26,25.76 22.94,25.76 38.73,41.55 JP1.6
RXD0_EXT  (via drill 0.3)
  Top 0.178: v27.3,4.57 v27.3,6.1
  Bottom 0.178: PAD9.1 26.16,1.91 27.3,3.05 v27.3,4.57 | JP1.2 38.71,36.73 38.71,23.77 27.23,12.29 27.23,6.17 v27.3,6.1
SPI_MISO
  Top 0.178: U6.31 16.46,24.38 16.46,27.05 22.86,33.45 22.86,40.54 U2.2
SPI_MOSI
  Top 0.178: U6.37 8.71,25.39 9.45,26.13 9.45,30.61 5,35.05 2.13,35.05 0.96,36.22 0.96,43.79 2.13,44.96 21.18,44.96 24.84,41.3 24.84,40.69 U2.3
SPI_SCK
  Top 0.178: U6.30 17.68,24.38 17.68,27.74 26.82,36.88 26.82,40.54 U2.4
TXD
  Top 0.178: JP1.3 42.01,39.37 45.72,35.66 45.72,28.04 43.89,26.21 43.89,24.69 U7.3
TXD0  (via drill 0.3)
  Top 0.178: v12.04,25.76 11.28,24.99 11.28,24.38 U6.35
  Bottom 0.178: v12.04,25.76 12.5,25.76 12.95,25.3 23.16,25.3 38.71,40.84 40.08,40.84 41.15,41.91 JP1.5
TXD0_EXT
  Bottom 0.178: PAD8.1 30.1,2.29 30.1,5.21 32.94,8.05 32.94,17.55 41.15,25.76 41.15,36.73 JP1.1
UART_!DTR
  Top 0.178: 39.17,24.66 39.12,24.61 | 39.17,24.66 39.18,24.68 | 39.18,24.68 41.35,26.85 44.07,26.85 44.96,27.74 44.96,30.02 U7.13 | 39.17,24.66 39.17,23.16 37.95,21.95 Q6.E | 39.18,24.68 39.17,24.69 37.19,24.69 36.42,23.93 35.66,23.93 R9.2
UART_!RTS
  Top 0.178: U7.14 43.74,30.18 41.6,32.31 37.19,32.31 37.03,32.16 37.03,30.79 37.34,30.48 39.5,30.48 40.56,29.41 40.56,26.82 39.46,25.71 R10.2 38.1,25.76 37.19,26.67 34.75,26.67 33.22,25.15 31.09,25.15 Q5.E
USB_DN
  Top 0.178: J1.B7 52.58,24.69 51.87,24.69 50.72,25.83 48.26,25.83 47.62,25.2 U7.6
USB_DP
  Top 0.178: J1.B6 52.67,26.19 47.98,26.19 46.48,24.69 U7.5
V3
  Top 0.178: U7.4 44.96,24.54 44.96,23.62 43.59,22.25 C8.1
VBAT
  Top 0.178: 43.43,8.38 42.98,8.38 U5.2 | 43.43,8.38 43.43,7.01 44.04,6.4 C7.1 44.2,6.4 51.05,6.4 C3.1 51.21,6.4 54.71,9.91 | 43.43,8.38 U5.3 | 54.71,9.91 55.32,9.3 S3.3 | 54.71,9.91 53.95,10.67 53.19,10.67 Q2.3 53.03,10.82 53.03,14.48 U3.3
VBUS  (via drill 0.3)
  Top 0.178: C9.1 38.1,31.39 39.29,31.39 40.51,30.18 41.15,30.18 U7.16 41.27,28.29 41.95,27.43 v43.89,27.43 | 53.49,23.32 53.65,23.47 53.65,27.28 53.19,27.74 52.73,27.74 J1.B4/A9 | 53.49,23.32 53.19,23.01 52.73,23.01 J1.A4/B9 | C2.1 55.47,17.22 53.03,17.22 U3.4 52.88,17.22 v52.88,15.54 | 49.38,11.73 51.05,11.73 Q2.1 51.21,11.89 v52.58,13.26 | 49.38,11.73 48.92,11.28 D2.2 | 49.38,11.73 48.92,12.19 48.92,12.95 R5.2 | v53.65,23.32 53.49,23.32
  Bottom 0.178: v52.58,13.26 52.88,13.56 v52.88,15.54 52.88,22.55 | 52.88,22.55 v53.65,23.32 | 52.88,22.55 52.88,25.48 50.93,27.43 v43.89,27.43
VIBR_EN
  Top 0.178: R1.1 35.81,17.83 34.9,17.83 30.63,22.1 29.57,22.1 28.65,23.01 23.47,23.01 22.71,23.77 22.71,24.23 U6.26

## Text on the board
tPlace: © 2022 GHS | XstractiK | External / (Default) | Internal / (PROG) | Rx | Tx | DOMINATION | M+ | M- | PWR | PLAYER ~ UpperArm v1.0
bPlace: © 2022 GHS | XstractiK | PLAYER / UpperArm / v1.0 | Boot | M+ | M- | EN | TX | RX | +3V3 | GND